# Altium PCB basketball_robot_main_board_2018.PcbDoc
Units mm, origin at the board's own origin, x right, y up, seen from the top; angles counter-clockwise.
Board outline 50 x 25 mm, 2 copper layers (Top Layer, Bottom Layer), stack 1.571 mm thick; 70 components, 69 nets, 392 pads, 85 vias.
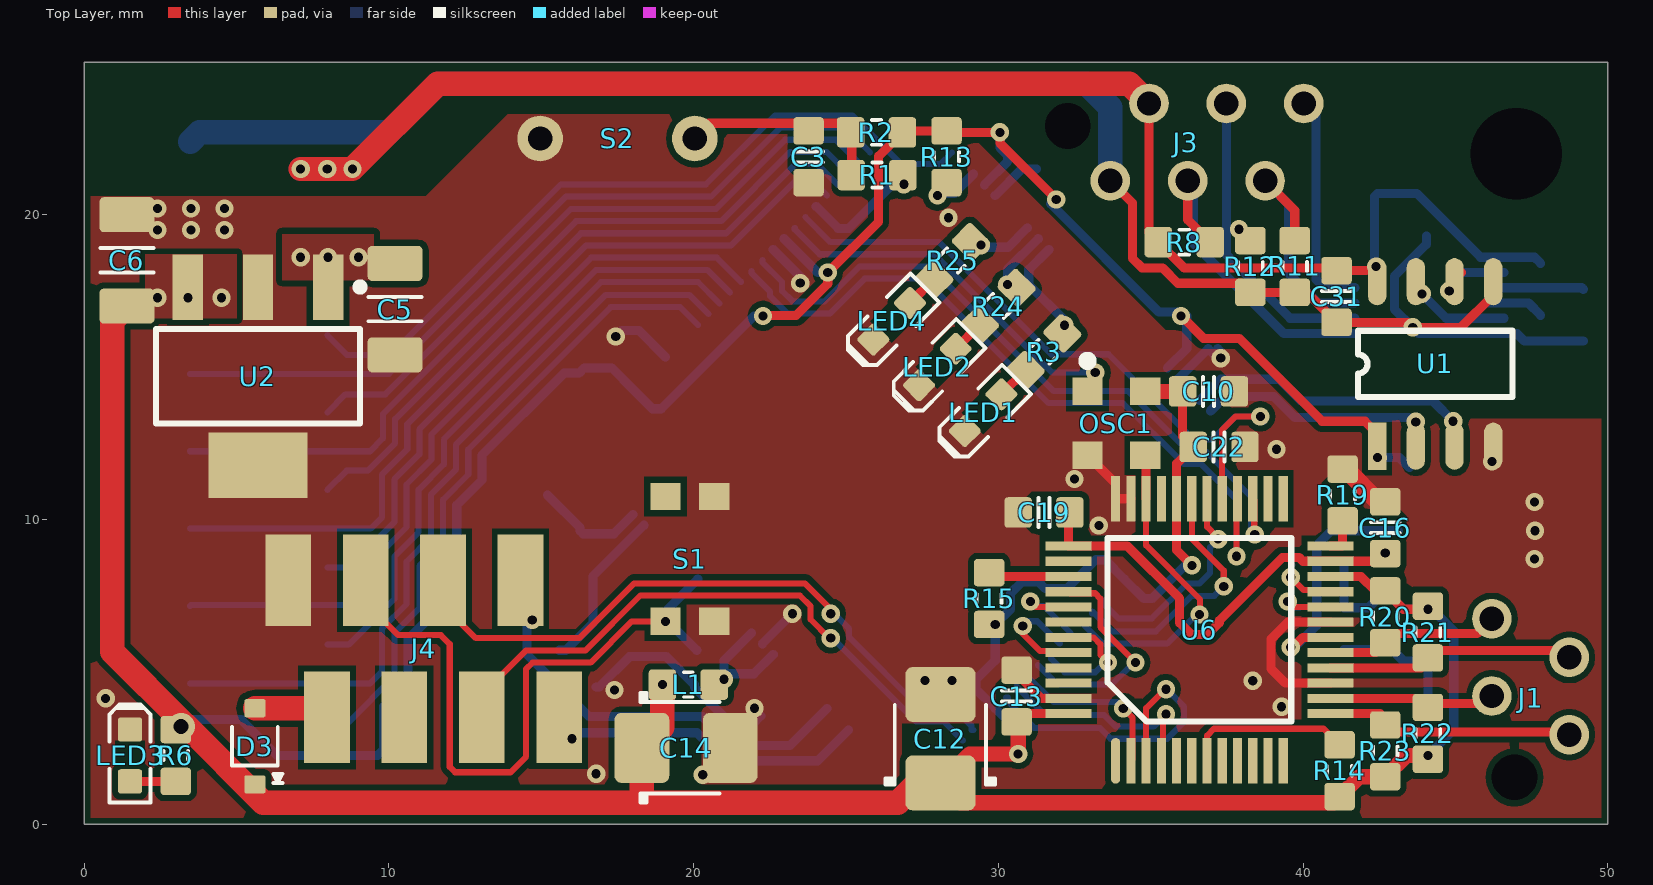
[diagram p0: Top Layer view]
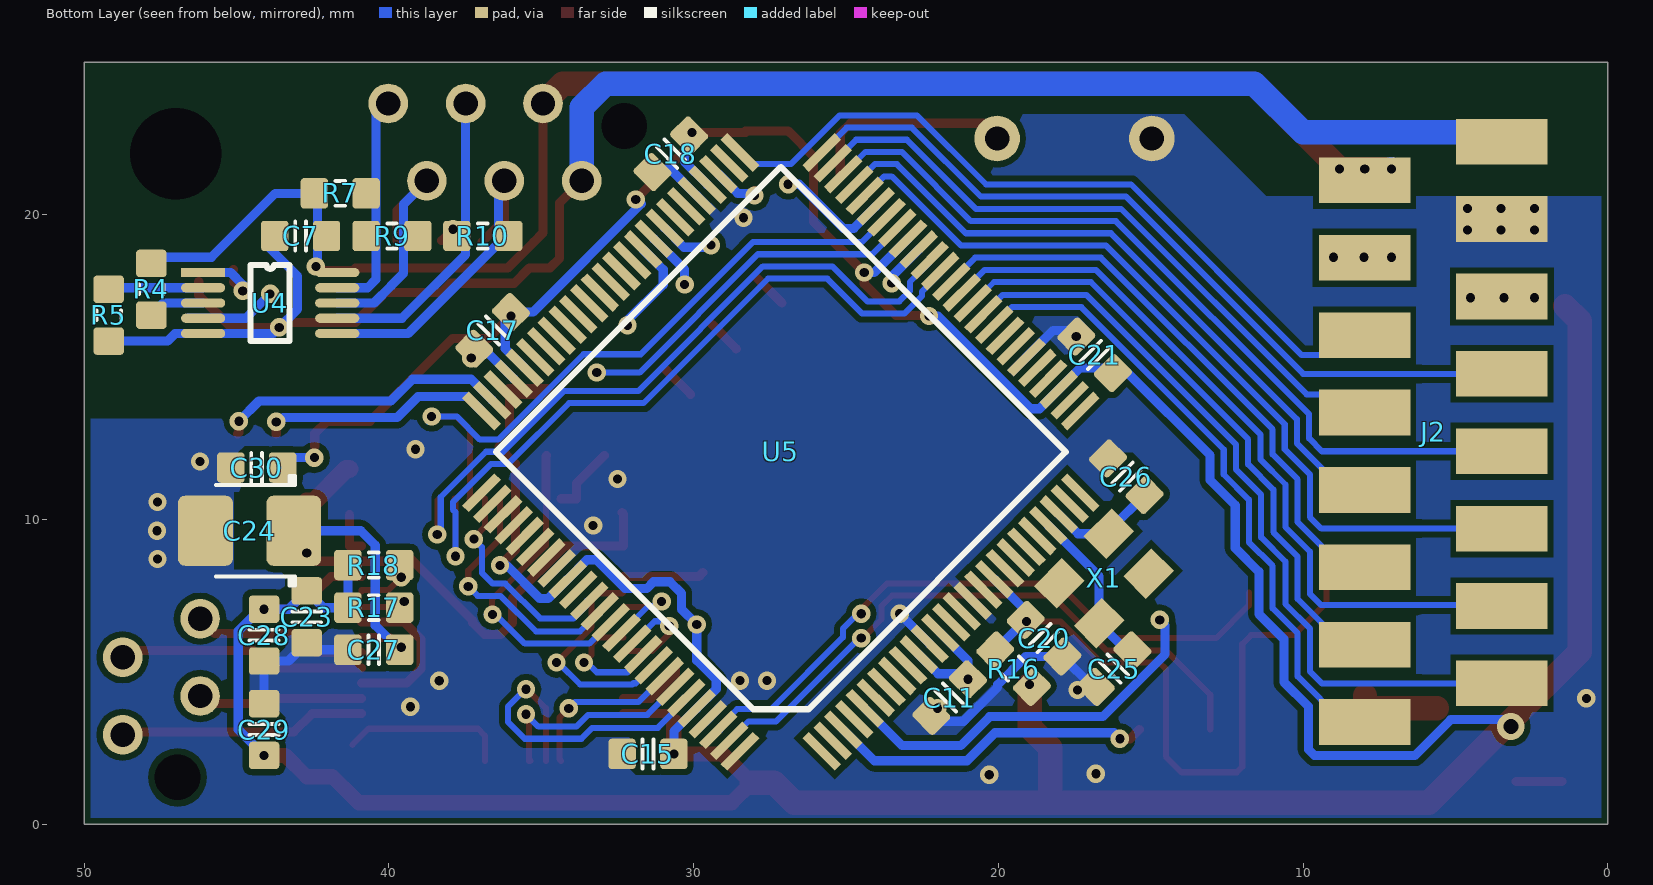
[diagram p1: Bottom Layer view, seen from below]

## Layer stack, top to bottom
Top Solder: solder mask 0.0102, Solder Resist, Dk 3.5
Top Layer: signal copper 0.0356
Dielectric 1: dielectric 1.5, FR-4, Dk 4.8
Bottom Layer: signal copper 0.0356
Bottom Solder: solder mask 0.0102, Solder Resist, Dk 3.5

## Board outline
0,0 50,0 50,25 0,25

## Design rules (kind name [scope] priority, off if disabled: settings)
BoardOutlineClearance [All] p1: gap=0.2 ignorepadtopadclearanceinfootprint=FALSE except(0: Arc-SplitContinuation Track-SplitContinuation SMDPad-SplitContinuation THPad-SplitContinuation Via-SplitContinuation Fill-SplitContinuation Poly-SplitContinuation Region-SplitContinuation Text-SplitContinuation)
Clearance [All] p1: gap=0.2 ignorepadtopadclearanceinfootprint=FALSE except(0: Arc-Hole Track-Hole SMDPad-Hole THPad-Hole Via-Hole Fill-Hole Poly-Hole Region-Hole Text-Hole)
ComponentClearance [All] p1: gap=0.2 collisioncheckmode=3 verticalgap=0.2 showdistances=FALSE
DiffPairsRouting [All] p1: maxlimit=1 minlimit=0.2 mostfreqgap=0.2 toplayer_minwidth=0.2 toplayer_maxwidth=1 toplayer_prefwidth=0.3 bottomlayer_minwidth=0.2 bottomlayer_maxwidth=1 bottomlayer_prefwidth=0.3 maxuncoupledlength=12.7
HoleSize [All] p1: absolutevalues=TRUE maxlimit=5 minlimit=0.025 maxpercent=80.000 minpercent=20.000
PolygonConnect [All] p1: connectstyle=Direct reliefconductorwidth=0.254 reliefentries=4 polygonreliefangle="90 Angle" airgapwidth=0.254
RoomDefinition basketball_robot_main_board_2018 [InComponentClass('basketball_robot_main_board_2018')] p1: confinementstyle=ConfineIn formatcopy=TRUE lockcomponents=FALSE outline -6,-5 54,-5 54,32 -6,32
RoutingVias [All] p1: holewidth=0.4 width=0.7 viastyle="Through Hole" minholewidth=0.3 minwidth=0.6 maxholewidth=3 maxwidth=4
SolderMaskExpansion SolderMaskExpansionTentedVia [IsVia] p1: expansion=-5
SolderMaskExpansion SolderMaskExpansion_1 [All] p2: expansion=0.102
Width [All] p1: maxlimit=2 minlimit=0.2 preferedwidth=0.3
27 further rules are at their usual default settings.

## Classes and differential pairs
differential pair TD: +TD_P -TD_N
differential pair RD: +RD_P -RD_N

## Components (designator, comment, footprint, x,y, rotation, side; value= is the part's Value field where it differs from the comment)
C3 "100n" CAPC1608X90N 23.77,21.9 r270 top
C5 "10u" CAPC3216X180N 10.2,16.9 r270 top value=10µ
C6 "10u" CAPC3216X180N 1.4,18.5 r90 top value=10µ
C7 "100n" CAPC1608X90N 42.9,19.3 r0 bottom
C10 "100n" CAPC1608X90N 36.9,14.2 r180 top value=18p
C11 "1u" CAPC1608X90N 21.6,4.15 r315 bottom value=1µ
C12 "10u Ta" CAPMP3528X210N 28.1,2.8 r90 top value=47µ
C13 "100n" CAPC1608X90N 30.6,4.2 r270 top value=18p
C14 "10u Ta" CAPMP3528X210N 19.75,2.5 r0 top value=47µ
C15 "100n" CAPC1608X90N 31.5,2.3 r0 bottom value=18p
C16 "100n" CAPC1608X90N 42.7,9.725 r90 top value=18p
C17 "100n" CAPC1608X90N 36.6,16.201 r315 bottom value=18p
C18 "100n" CAPC1608X90N 30.75,22 r315 bottom value=18p
C19 "100n" CAPC1608X90N 31.5,10.225 r0 top value=18p
C20 "100n" CAPC1608X90N 18.5,6.1 r225 bottom value=18p
C21 "100n" CAPC1608X90N 16.84,15.4 r45 bottom value=18p
C22 "100n" CAPC1608X90N 37.245,12.375 r180 top value=18p
C23 "100n" CAPC1608X90N 42.7,6.8 r90 bottom value=18p
C24 "10u Ta" CAPMP3528X210N 44.575,9.625 r0 bottom value=47µ
C25 "8p" CAPC1608X90N 16.2,5.1 r315 bottom value=18p
C26 "8p" CAPC1608X90N 15.8,11.4 r45 bottom value=18p
C27 "100n" CAPC1608X90N 40.5,5.718 r180 bottom value=18p
C28 "100n" CAPC1608X90N 44.1,6.2 r90 bottom value=18p
C29 "100n" CAPC1608X90N 44.1,3.1 r90 bottom value=18p
C30 "100n" CAPC1608X90N 44.341,11.7 r0 bottom
C31 "100n" CAPC1608X90N 41.1,17.315 r90 top
D3 "" SOD323 5.6,2.55 r90 top
J1 "ETHERNET" MICRO-MATCH-FOB-04 48.74,2.93 r270 top
J2 "HEADER-16" MICRO-MATCH-FOB-SMD-16 5.725,22.395 r90 bottom
J3 "RS485" MICRO-MATCH-FOB-06 33.675,21.11 r180 top
J4 "HEADER-8" MICRO-MATCH-FOB-SMD-08 6.695,5.75 r180 top
L1 "10uH" INDC1608N 19.823,4.574 r0 top value="120R @ 100 MHz"
LED1 "White" LED-0603-WHITE 29.5,13.5 r225 top
LED2 "White" LED-0603-WHITE 28,15 r225 top
LED3 "White" LED-0603-WHITE 1.5,2.25 r90 top
LED4 "White" LED-0603-WHITE 26.5,16.5 r225 top
OSC1 "DSC1033" DSC1033-3.2x2.5 32.927,14.2 r270 top
R1 "1k" RESC1608X55N 26.019,21.3 r0 top value=120R
R2 "10k" RESC1608X55N 26,22.7 r0 top value=120R
R3 "1k" RESC1608X55N 31.5,15.5 r45 top value=120R
R4 "10k" RESC1608X55N 47.8,17.55 r90 bottom value=120R
R5 "10k" RESC1608X55N 49.2,16.7 r90 bottom value=120R
R6 "1k" RESC1608X55N 3,2.25 r90 top value=120R
R7 "750R" RESC1608X55N 41.6,20.7 r180 bottom value=120R
R8 "750R" RESC1608X55N 36.1,19.1 r0 top value=120R
R9 "120R" RESC1608X55N 39.9,19.3 r180 bottom
R10 "120R" RESC1608X55N 36.921,19.3 r0 bottom
R11 "750R" RESC1608X55N 39.729,18.3 r270 top value=120R
R12 "750R" RESC1608X55N 38.271,18.3 r270 top value=120R
R13 "10k" RESC1608X55N 28.3,21.9 r90 top value=10K
R14 "10k" RESC1608X55N 41.2,1.75 r270 top value=10K
R15 "2.2k" RESC1608X55N 29.7,7.4 r90 top value=10K
R16 "10k" RESC1608X55N 19.5,5.1 r45 bottom value=10K
R17 "2.2k" RESC1608X55N 40.5,7.1 r0 bottom value=10K
R18 "2.2k" RESC1608X55N 40.5,8.5 r0 bottom value=10K
R19 "4.87k" RESC1608X55N 41.3,10.8 r90 top value=10K
R20 "49.9R" RESC1608X55N 42.7,6.8 r90 top value=10K
R21 "49.9R" RESC1608X55N 44.1,6.3 r270 top value=10K
R22 "49.9R" RESC1608X55N 44.1,2.975 r270 top value=10K
R23 "49.9R" RESC1608X55N 42.7,2.4 r90 top value=10K
R24 "1k" RESC1608X55N 30,17 r45 top value=120R
R25 "1k" RESC1608X55N 28.5,18.5 r45 top value=120R
S1 "PUSHBUTTON" KMR421NGLFS 19.875,8.7 r270 top
S2 "PUSHBUTTON" NKK_AB11AP-FA 17.5,22.5 r180 top
U1 "SI8621" SOIC8 42.435,12.4 r90 top
U2 "MCP1825S" SOT230P700X180-4N 5.7,14.7 r270 top
U4 "SN65HVD73" SOP10 46.1,18.1 r180 bottom
U5 "LPC1768" LQFP100 25.793,2.382 r45 bottom locked
U6 "DP83848C" PQFP48 33.85,2.075 r90 top locked
X1 "12MHz" XTAL-3.2x2.5 16.374,9.526 r315 bottom

## Footprints (in the part's own frame and the unit in brackets; to place one, negate y for a bottom-side part, rotate by r counter-clockwise, add the part's x,y. Pads: shape width x height; smd on the part's side, far side on the other; paste and mask are expansions set on the pad)
CAPC1608X90N [mm] "Chip Capacitor, Body 1.6x0.8mm, EIA 0603, IPC Medium Density"
  round 0.254 on Mech15: 0(0,0)
  rrect25% 0.9x1 smd: 1(-0.85,0) 2(0.85,0)
  Top Layer pour cut-out: -0.6,0.5 -0.4,0.7 0.4,0.7 0.6,0.5 0.6,-0.5 0.4,-0.7 -0.4,-0.7 -0.6,-0.5
  silkscreen extent -0.18,-0.48 0.18,0.48, body extent -0.85,-0.45 0.85,0.45, height 0.89
CAPC3216X180N [mm] "Chip Capacitor, Body 3.2x1.6mm, 1.8mm H, EIA 1206, IPC Medium Density"
  round 0.508 on Mech15: 0(0,0)
  rrect25% 1.15x1.8 smd: 1(-1.5,0) 2(1.5,0)
  silkscreen extent -0.4,-0.88 0.4,0.88, body extent -1.7,-0.9 1.7,0.9, height 1.8
CAPMP3528X210N [mm] "Molded body capacitor, Body 3.5x2.8mm, 1210, IPC Nominal settings"
  round 0.254 on Mech15: 0(0,0)
  rrect25% 1.8x2.3 smd: 1(-1.45,0) 2(1.45,0)
  Top Layer pour cut-out: -0.508,1.27 0.508,1.27 0.508,-1.27 -0.508,-1.27
  silkscreen extent -1.5,-1.8 1.1,1.8, body extent -1.75,-1.4 1.75,1.4, height 2.1
DSC1033-3.2x2.5 [mm]
  rect 0.9x1 smd: 1(0,0) 2(2.1,0) 3(2.1,1.9) 4(0,1.9)
  silkscreen extent -1.1,-0.1 -0.9,0.1, body extent -0.55,-0.3 2.65,2.2, height 0.8
INDC1608N [mm] "Chip bead, Body 1.6x0.8mm, 0603, IPC Medium Density"
  round 0.254 on Mech15: 0(0,0)
  rrect25% 0.9x1 smd: 1(-0.85,0) 2(0.85,0)
  Top Layer pour cut-out: -0.4,0.6 0.4,0.6 0.4,-0.6 -0.4,-0.6
  silkscreen extent -0.15,-0.41 0.15,0.41, body extent -0.8,-0.4 0.8,0.4, height 0.79
KMR421NGLFS [mm]
  rect 0.9x1 smd: 1(-2.05,0.8) 1(2.05,0.8) 2(-2.05,-0.8) 2(2.05,-0.8)
  body extent -2.1,-1.4 2.1,1.4, height 2.5
LED-0603-WHITE [mm]
  round 0.254 on Mech15: 0(0,0)
  rrect25% 0.8x0.8 smd: A(-0.85,0) K(0.85,0)
  Top Layer pour cut-out: -0.5,0.5 0.5,0.5 0.5,-0.5 -0.5,-0.5
  silkscreen extent -1.55,-0.68 1.68,0.68, body extent -0.8,-0.4 0.8,0.4, height 0.75
LQFP100 [mm]
  rect 1.5x0.3 smd: 1(0,0) 2(0,-0.5) 3(0,-1) 4(0,-1.5) 5(0,-2) 6(0,-2.5) 7(0,-3) 8(0,-3.5) 9(0,-4) 10(0,-4.5) 11(0,-5) 12(0,-5.5) 13(0,-6) 14(0,-6.5) 15(0,-7) 16(0,-7.5) 17(0,-8) 18(0,-8.5) 19(0,-9) 20(0,-9.5) 21(0,-10) 22(0,-10.5) 23(0,-11) 24(0,-11.5) 25(0,-12) 51(15.8,-12) 52(15.8,-11.5) 53(15.8,-11) 54(15.8,-10.5) 55(15.8,-10) 56(15.8,-9.5) 57(15.8,-9) 58(15.8,-8.5) 59(15.8,-8) 60(15.8,-7.5) 61(15.8,-7) 62(15.8,-6.5) 63(15.8,-6) 64(15.8,-5.5) 65(15.8,-5) 66(15.8,-4.5) 67(15.8,-4) 68(15.8,-3.5) 69(15.8,-3) 70(15.8,-2.5) 71(15.8,-2) 72(15.8,-1.5) 73(15.8,-1) 74(15.8,-0.5) 75(15.8,0)
  rect 0.3x1.5 smd: 26(1.9,-13.9) 27(2.4,-13.9) 28(2.9,-13.9) 29(3.4,-13.9) 30(3.9,-13.9) 31(4.4,-13.9) 32(4.9,-13.9) 33(5.4,-13.9) 34(5.9,-13.9) 35(6.4,-13.9) 36(6.9,-13.9) 37(7.4,-13.9) 38(7.9,-13.9) 39(8.4,-13.9) 40(8.9,-13.9) 41(9.4,-13.9) 42(9.9,-13.9) 43(10.4,-13.9) 44(10.9,-13.9) 45(11.4,-13.9) 46(11.9,-13.9) 47(12.4,-13.9) 48(12.9,-13.9) 49(13.4,-13.9) 50(13.9,-13.9) 76(13.9,1.9) 77(13.4,1.9) 78(12.9,1.9) 79(12.4,1.9) 80(11.9,1.9) 81(11.4,1.9) 82(10.9,1.9) 83(10.4,1.9) 84(9.9,1.9) 85(9.4,1.9) 86(8.9,1.9) 87(8.4,1.9) 88(7.9,1.9) 89(7.4,1.9) 90(6.9,1.9) 91(6.4,1.9) 92(5.9,1.9) 93(5.4,1.9) 94(4.9,1.9) 95(4.4,1.9) 96(3.9,1.9) 97(3.4,1.9) 98(2.9,1.9) 99(2.4,1.9) 100(1.9,1.9)
  silkscreen extent 1.28,-12.61 14.51,0.62, body extent -0.1,-14 15.9,2, height 1.6
MICRO-MATCH-FOB-04 [mm]
  round 1.3 hole 0.8: 1(0,0) 2(-1.27,-2.54) 3(-2.54,0) 4(-3.81,-2.54)
  round 0 hole 1.5 unplated: drill(1.4,-1.8)
  body extent -5.41,-3.77 1.6,1.23, height 4
MICRO-MATCH-FOB-06 [mm]
  round 1.3 hole 0.8: 1(0,0) 2(-1.27,-2.54) 3(-2.54,0) 4(-3.81,-2.54) 5(-5.08,0) 6(-6.35,-2.54)
  round 0 hole 1.5 unplated: drill(1.4,-1.8)
  body extent -7.95,-3.77 1.6,1.23, height 4
MICRO-MATCH-FOB-SMD-08 [mm]
  rect 1.5x3 smd: 1(0,-2.25) 2(-1.27,2.25) 3(-2.54,-2.25) 4(-3.81,2.25) 5(-5.08,-2.25) 6(-6.35,2.25) 7(-7.62,-2.25) 8(-8.89,2.25)
  body extent -10.49,-3.45 1.6,3.45, height 5.25
MICRO-MATCH-FOB-SMD-16 [mm]
  rect 1.5x3 smd: 1(0,-2.25) 2(-1.27,2.25) 3(-2.54,-2.25) 4(-3.81,2.25) 5(-5.08,-2.25) 6(-6.35,2.25) 7(-7.62,-2.25) 8(-8.89,2.25) 9(-10.16,-2.25) 10(-11.43,2.25) 11(-12.7,-2.25) 12(-13.97,2.25) 13(-15.24,-2.25) 14(-16.51,2.25) 15(-17.78,-2.25) 16(-19.05,2.25)
  body extent -20.65,-3.45 1.6,3.45, height 5.25
NKK_AB11AP-FA [mm]
  round 1.5 hole 0.8: 1(-2.54,0) 2(2.54,0)
  body extent -4.9,-2.01 4.9,3.84, height 19.42
PQFP48 [mm]
  oval 1.5x0.3 smd: 1(0,0)
  rect 1.5x0.3 smd: 2(0,-0.5) 3(0,-1) 4(0,-1.5) 5(0,-2) 6(0,-2.5) 7(0,-3) 8(0,-3.5) 9(0,-4) 10(0,-4.5) 11(0,-5) 12(0,-5.5) 25(8.6,-5.5) 26(8.6,-5) 27(8.6,-4.5) 28(8.6,-4) 29(8.6,-3.5) 30(8.6,-3) 31(8.6,-2.5) 32(8.6,-2) 33(8.6,-1.5) 34(8.6,-1) 35(8.6,-0.5) 36(8.6,0)
  rect 0.3x1.5 smd: 13(1.55,-7.05) 14(2.05,-7.05) 15(2.55,-7.05) 16(3.05,-7.05) 17(3.55,-7.05) 18(4.05,-7.05) 19(4.55,-7.05) 20(5.05,-7.05) 21(5.55,-7.05) 22(6.05,-7.05) 23(6.55,-7.05) 24(7.05,-7.05) 37(7.05,1.55) 38(6.55,1.55) 39(6.05,1.55) 40(5.55,1.55) 41(5.05,1.55) 42(4.55,1.55) 43(4.05,1.55) 44(3.55,1.55) 45(3.05,1.55) 46(2.55,1.55) 47(2.05,1.55) 48(1.55,1.55)
  silkscreen extent 1.28,-5.76 7.31,0.27, body extent -0.27,-7.33 8.87,1.82, height 1.62
RESC1608X55N [mm] "Chip Resistor, Body 1.6x0.8mm, EIA 0603, IPC Medium Density"
  round 0.254 on Mech15: 0(0,0)
  rrect25% 0.9x1 smd: 1(-0.85,0) 2(0.85,0)
  Top Layer pour cut-out: -0.6,0.5 -0.4,0.7 0.4,0.7 0.6,0.5 0.6,-0.5 0.4,-0.7 -0.4,-0.7 -0.6,-0.5
  silkscreen extent -0.15,-0.41 0.15,0.41, body extent -0.87,-0.47 0.88,0.48, height 0.54
SOD323 [mm] "SOD-323; 2 Leads; Body 1.8 x 1.35 mm, (LxW)"
  round 0.508 on Mech15: 0(0,0)
  rrect25% 0.6x0.7 smd: A(1.25,0) K(-1.25,0)
  silkscreen extent -1.2,-0.9 0.64,0.75, body extent -1.3,-0.68 1.3,0.68, height 1.1
SOIC8 [mm]
  rect 1.55x0.6 smd: 1(0,0)
  oval 1.55x0.6 smd: 2(0,-1.27) 3(0,-2.54) 4(0,-3.81) 5(5.4,-3.81) 6(5.4,-2.54) 7(5.4,-1.27) 8(5.4,0)
  silkscreen extent 1.61,-4.44 3.79,0.64, body extent -0.16,-4.35 5.61,0.55, height 1.46
SOP10 [mm]
  rect 1.45x0.3 smd: 1(0,0)
  oval 1.45x0.3 smd: 2(0,-0.5) 3(0,-1) 4(0,-1.5) 5(0,-2) 6(4.4,-2) 7(4.4,-1.5) 8(4.4,-1) 9(4.4,-0.5) 10(4.4,0)
  silkscreen extent 1.56,-2.25 2.84,0.25, body extent -0.27,-2.5 4.63,0.5, height 1.15
SOT230P700X180-4N [mm] "SOT223, 4-Leads, Body 6,50x7,00mm (avg), Pitch 2,30mm, IPC Medium Density"
  rect 2.15x1 smd: 1(-2.925,2.3) 2(-2.925,0) 3(-2.925,-2.3)
  rect 2.15x3.25 smd: 4(2.925,0)
  silkscreen extent -3.05,-3.35 1.55,3.48, body extent -1.85,-3.35 1.85,3.35, height 1.8
XTAL-3.2x2.5 [mm]
  rect 1.3x1.05 smd: 1(0,0) 2(2.3,0) 3(2.3,1.85) 4(0,1.85)
  body extent -0.45,-0.32 2.75,2.18, height 0.8

## Part data
C3 C7 C30 C31: library part CAPC_100n_0603_X7R_50V_10%, "Capacitor SMD Cer 100nF 10% 50V X7R 0603", Manufacturer 1="AVX Corporation", Manufacturer 2="TDK Corporation", Manufacturer Part Number 1=06035C104KAT2A, Manufacturer Part Number 2=C1608X7R1H104K, Package / Case="0603 (1608 Metric)", Ratings="50V; X7R", Supplier Part Number 1=478-5052-1-ND, Tolerance=±10%, ComponentLink1Description=http://www.avx.com/docs/Catalogs/cx7r.pdf, ComponentLink1URL=http://www.avx.com/docs/Catalogs/cx7r.pdf, ComponentLink2Description=http://product.tdk.com/capacitor/mlcc/en/documents/mlcc_commercial_general_en.pdf, ComponentLink2URL=http://product.tdk.com/capacitor/mlcc/en/documents/mlcc_commercial_general_en.pdf, Material=ceramic, SCDType=spec, Supplier 1=Digi-Key, Supplier 2=Digi-Key, Supplier Part Number 2=445-1314-1-ND
C5 C6: library part CAPC_10u_1206_10V, "Capacitor SMD Cer 10uF 10% 10V X5R 1206", Manufacturer 1=KEMET, Manufacturer Part Number 1=C1206C106K8PACTU, Package / Case="1206 (3216 metric)", Ratings="10V; X5R", Supplier Part Number 1=C1206C106K8PACTU-ND, Tolerance=±10%, Material=ceramic, SCDType=undef, Supplier 1=Digi-Key
C10 C13 C15 C16 C17 C18 C19 C20 C21 C22 C23 C25 C26 C27 C28 C29: library part CAPC_18p_0603_100V, "Capacitor SMD Cer 18pF 2% 100V NP0 0603", Manufacturer 1="AVX Corporation", Manufacturer Part Number 1=06031A180GAT2A, Operating Temperature="-55°C ~ 125°C", Package / Case="0603 (1608 Metric)", Ratings="100V; NP0", Supplier Part Number 1=478-6025-1-ND, Tolerance=±2%, ComponentLink1Description=http://www.avx.com/docs/Catalogs/ccog.pdf, ComponentLink1URL=http://www.avx.com/docs/Catalogs/ccog.pdf, SCDType=spec, Size / Dimension="0.063\" L x 0.032\" W (1.60mm x 0.81mm)", Supplier 1=Digi-Key, Thickness (Max)="0.035\" (0.90mm)"
C11: library part CAPC_1u_0603_X7R_16V_10%, "Capacitor SMD Cer 1uF 10% 16V X7R 0603", Manufacturer 1="TDK Corporation", Manufacturer Part Number 1=C1608X7R1C105K, Package / Case="0603 (1608 metric)", Ratings="16V; X7R", Supplier Part Number 1=445-1604-1-ND, Tolerance=±10%, ComponentLink1Description=http://product.tdk.com/capacitor/mlcc/en/documents/mlcc_commercial_general_en.pdf, ComponentLink1URL=http://product.tdk.com/capacitor/mlcc/en/documents/mlcc_commercial_general_en.pdf, Material=ceramic, SCDType=spec, Supplier 1=Digi-Key
C12 C14 C24: library part CAPT_47u_1210_6V3, "Capacitor SMD Tantalum 47uF 20% 6.3V 1210", ESR (Equivalent Series Resistance)="70.0 mOhm", Manufacturer 1="AVX Corporation", Manufacturer Part Number 1=TCJB476M006R0070, Manufacturer Size Code=B, Operating Temperature="-55°C ~ 125°C", Package / Case="1210 (3528 Metric)", Ratings=6.3V, Supplier Part Number 1=478-3139-1-ND, Tolerance=±20%, Voltage - Rated=6V3, ComponentLink1Description=http://www.avx.com/docs/Catalogs/tcj.pdf, ComponentLink1URL=http://www.avx.com/docs/Catalogs/tcj.pdf, Height - Seated (Max)="0.083\" (2.10mm)", Material=Tantalum, SCDType=spec, Size / Dimension="0.138\" L x 0.110\" W (3.50mm x 2.80mm)", Supplier 1=Digi-Key, Type=Molded
D3: library part DIODE_SCHOTTKY_SS0520, "Diode Schottky SMD 20V 0.5A SOD123", Manufacturer 1="Fairchild Semiconductor", Manufacturer 2="ON Semiconductor", Manufacturer 3="Diodes Inc", Manufacturer 4="DC Components Co", Manufacturer Part Number 1=MBR0520L, Manufacturer Part Number 2=MBR0520LT1G, Manufacturer Part Number 3=B0520LW-7-F, Manufacturer Part Number 4=SS0520, Package / Case=SOD-123, Ratings="20V; 0.5A", Supplier Part Number 1=MBR0520LCT-ND, ComponentLink1Description=http://www.fairchildsemi.com/ds/MB/MBR0520L.pdf, ComponentLink1URL=http://www.fairchildsemi.com/ds/MB/MBR0520L.pdf, ComponentLink2Description=http://www.onsemi.com/pub_link/Collateral/MBR0520LT1-D.PDF, ComponentLink2URL=http://www.onsemi.com/pub_link/Collateral/MBR0520LT1-D.PDF, ComponentLink3Description=http://www.diodes.com/datasheets/ds30051.pdf, ComponentLink3URL=http://www.diodes.com/datasheets/ds30051.pdf, Material=Si, SCDType=source, Supplier 1=Digi-Key, Supplier 2=Digi-Key, Supplier 3=Digi-Key, Supplier Part Number 2=MBR0520LT1GOSCT-ND, Supplier Part Number 3=B0520LW-FDICT-ND
J1: library part HEADER-4
J3: library part HEADER-6
L1: library part FERRITE_120R-100MHz_0603, "Ferrite bead 120 Ohm at 100 MHz 2A 0603 SMD", Current=900mA, Current Rating=2A, DC Resistance (DCR)="172.9 mOhm Max", Frequency - Self Resonant=23MHz, Frequency - Test=100kHz, Impedance @ Frequency="120 Ohm @ 100MHz", Manufacturer 1="Murata Electronics North America", Manufacturer Part Number 1=BLM18PG121SN1D, Operating Temperature="-40°C ~ 105°C", Package / Case="1210 (3225 Metric)", Ratings="2 A; 50 mO DC", Supplier Part Number 1=490-1037-1-ND, Applications="Power Supplies", ComponentLink1Description=http://www.yuden.co.jp/ut/product/pdf/wound02_e.pdf, ComponentLink1URL=http://www.yuden.co.jp/ut/product/pdf/wound02_e.pdf, ComponentLink2Description=http://search.murata.co.jp/Ceramy/image/img/PDF/ENG/L0110S0100BLM18P.pdf, ComponentLink2URL=http://search.murata.co.jp/Ceramy/image/img/PDF/ENG/L0110S0100BLM18P.pdf, Current - Saturation=900mA, Current - Temperature Rise=900mA, Filter Type="Differential Mode - Single", Height (Max)="0.037\" (0.95mm)", Mounting Type="Surface Mount", Number of Lines=1, SCDType=source, Size / Dimension="0.063\" L x 0.031\" W (1.60mm x 0.80mm)", Supplier 1=Digi-Key
LED1 LED2 LED3 LED4: library part LED_SMD_White_0603_Bright, "LED 0603 SMD Bright White 8700K", Luminous Flux @ Current - Test=-, Manufacturer 1="Lite-On Inc", Manufacturer 2="Kingbright Corp", Manufacturer Part Number 1=LTW-C193TS5, Manufacturer Part Number 2=APT1608QWF/D, Millicandela Rating=230mcd, Package / Case="0603 (1608 metric)", Ratings="Ultra Bright; 8700K", Supplier Part Number 1=160-1721-1-ND, Voltage - Forward (Vf) @ 10mA=3.0V, Voltage - Forward (Vf) Typ=3.3V, Color=White, ComponentLink1Description=http://media.digikey.com/pdf/Data%20Sheets/Lite-On%20PDFs/LTW-C193TS5.pdf, ComponentLink1URL=http://media.digikey.com/pdf/Data%20Sheets/Lite-On%20PDFs/LTW-C193TS5.pdf, ComponentLink2Description=http://www.kingbrightusa.com/images/catalog/SPEC/APT1608QWF-D.pdf, ComponentLink2URL=http://www.kingbrightusa.com/images/catalog/SPEC/APT1608QWF-D.pdf, Lens Style/Size="Rectangle with Flat Top, 0.8mm x 1.1mm", Lens Type="Clear, Tinted", Material=InGaN, Mounting Type="Surface Mount", SCDType=source, Size / Dimension="1.60mm L x 0.80mm W", Supplier 1=Digi-Key, Supplier 2=Digi-Key, Supplier Part Number 2=APT1608QWF/D-ND, Viewing Angle=120°
R1 R2 R3 R4 R5 R6 R7 R8 R9 R10 R11 R12 R24 R25: library part RES_120R_0603_5%, "Resistor SMD chip 120 Ohm 0.1W 5% 0603", Manufacturer 1="Vishay Dale", Manufacturer 2=Yageo, Manufacturer Part Number 1=CRCW0603120RJNEA, Manufacturer Part Number 2=RC0603JR-07120RL, Package / Case="0603 (1608 metric)", Ratings="1/10 W", Supplier Part Number 1=541-120GCT-ND, Tolerance=±5%, ComponentLink1Description=http://www.vishay.com/doc?20035, ComponentLink1URL=http://www.vishay.com/doc?20035, ComponentLink2Description=http://www.yageo.com/documents/recent/PYu-RC0603_51_RoHS_L_4.pdf, ComponentLink2URL=http://www.yageo.com/documents/recent/PYu-RC0603_51_RoHS_L_4.pdf, Material="Thick Film", SCDType=spec, Supplier 1=Digi-Key, Supplier 2=Digi-Key, Supplier Part Number 2=311-120GRCT-ND
R13 R14 R15 R16 R17 R18 R19 R20 R21 R22 R23: library part RES_10K_0603_5%, "Resistor SMD chip 10k Ohm 0.1W 5% 0603", Manufacturer 1=Yageo, Manufacturer 2="Vishay Dale", Manufacturer Part Number 1=RC0603JR-0710KL, Manufacturer Part Number 2=CRCW060310K0JNEA, Package / Case="0603 (1608 metric)", Ratings="1/10 W", Supplier Part Number 1=311-10KGRCT-ND, Tolerance=±5%, ComponentLink1Description=http://www.yageo.com/documents/recent/PYu-RC0603_51_RoHS_L_4.pdf, ComponentLink1URL=http://www.yageo.com/documents/recent/PYu-RC0603_51_RoHS_L_4.pdf, ComponentLink2Description=http://www.vishay.com/doc?20035, ComponentLink2URL=http://www.vishay.com/doc?20035, Material="Thick Film", SCDType=spec, Supplier 1=Digi-Key, Supplier 2=Digi-Key, Supplier Part Number 2=541-10KGCT-ND
U2: library part MIC5239
U4: library part SN65HVD3086E
X1: library part XTAL-3.2X2.5

## Free pads (board coordinates)
  round 0 hole 3 unplated: 2(47,22)

## Via types
v1: diameter 0.6, hole 0.3, Top Layer to Bottom Layer, 84 vias
v2: diameter 0.9, hole 0.5, Top Layer to Bottom Layer, 1 vias

## Nets (pads, with @x,y where several pads share a name; then routed paths per layer and width w, separated by ;. In a path a pad name is that pad's centre, name@x,y a point inside that pad or via, vN(x,y) a via of type N, cw(c..) or ccw(c..) an arc to the next point about the centre after c; other vN are vias at no path point)
3.3V: C6.1 C10.2 C12.1 C13.2 C14.1 C15.1 C17.1 C18.1 C21.1 C22.2 C23.2 C28.2 C29.1 C30.1 D3.K J2.5 L1.1 OSC1.4 R2.2 R6.2 R13.2 R14.2 R15.1 R16.1 R17.2 R18.2 R20.2 R21.1 R22.2 R23.1 U1.1 U2.3 U5.28 U5.42 U5.54 U5.71 U5.84 U5.96 U6.22 U6.32 U6.48 | length 170.2
  Top Layer w0.3: v1(22.276,16.676) 22.342,16.676 22.36,16.694 23.362,16.694 24.4,17.733 v1(24.4,18.1) 26.069,19.769 26.069,21.919 R2.2 26.9,22.75 R13.2 ; R13.2@28.3,22.701 v1(30.049,22.701) 30.049,22.351 v1@31.8,20.6 ; C13.2 30.875,3.625 U6.48 ; v1(35.999,16.676) 36.736,15.939 37.908,15.939 40.628,13.22 42.031,13.22 42.435,12.816 U1.1 ; C10.2 36.05,12.72 C22.2 35.85,11.83 U6.32 35.85,8.991 v1(36.353,8.488) ; U6.22 41.9,8.125 42.375,7.65 R20.2 43.3,7.05 v1(44.1,7.05)
  Top Layer w0.5: C13.2 30.65,3.3 v1(30.65,2.3) 29.05,2.3 C12.1 28.75,0.7 41,0.7 R14.2 41.85,1.55 R23.1 43.4,2.25 v1(44.1,2.25) ; OSC1.4 C10.2
  Top Layer w0.8: C6.1 0.917,16.517 0.917,5.656 R6.2@3.273,3.3 ; R6.2@3.336,3.236 5.873,0.7 18.2,0.7 ; v1(18.973,4.574) 18.973,3.173 C14.1 18.3,0.8 18.2,0.7 ; C12.1 27.35,1.35 26.7,0.7 18.2,0.7
  Bottom Layer w0.3: v2(3.175,3.2) 3.4,3.425 5.15,3.425 6.33,2.245 9.62,2.245 9.825,2.45 9.825,3.859 10.625,4.659 10.625,6.067 11.45,6.892 11.45,8.285 12.225,9.06 12.225,10.46 13.05,11.285 13.05,12.105 15.744,14.799 C21.1 16.409,14.969 17.307,14.969 U5.28 18.647,13.629 18.937,13.629 21.984,16.676 v1(22.276,16.676) ; U5.42 24.076,18.1 v1(24.4,18.1) ; U5.54 30.3,21.739 30.3,21.949 30.049,22.2 v1(30.049,22.701) ; v1(30.65,2.3) 30.65,3.04 U5.96 29.261,4.43 29.261,4.731 29.9,5.37 v1(29.9,6.55) 30.4,7.05 30.4,7.569 30.781,7.95 31.319,7.95 31.544,7.725 32.25,7.725 33.2,8.675 33.501,8.675 U5.84 34.776,7.4 35.053,7.4 36.141,8.488 v1(36.353,8.488) ; v1@31.718,20.357 35.273,16.802 C17.1 v1(35.999,16.676) ; U5.71 36.183,15.602 C17.1@36.183,16.676 ; R18.2 R17.2 42.15,7.1 C23.2 43.3,7.05 v1(44.1,7.05) ; v1(42.45,12.025) 43.166,12.025 C30.1 ; v1(44.1,2.25) 44.95,3.1 44.95,6.333 44.233,7.05 v1(44.1,7.05) ; C28.2@44.375,7.325 v1(44.1,7.05)
  other v1: 2.4,17.275 3.4,17.275 4.5,17.275 31.9,20.5
3.3V_RS485: C7.1 C31.2 J2.2 J3.2 R4.2 R7.1 R8.1 U1.8 U4.10 | length 50
  Top Layer w0.3: J3.2 34.945,19.405 R8.1 36.1,18.25 41.1,18.25 C31.2 42.07,18.165
  Top Layer w0.8: v1(7.1,21.5) v1(7.975,21.5) v1(8.8,21.5) 11.6,24.3 34.295,24.3 J3.2
  Bottom Layer w0.3: v1(42.4,18.3) 42.35,18.35 42.35,20.6 R7.1 43.729,20.7 45.829,18.6 47.6,18.6 R4.2
5V: C5.1 J2.4 U2.1
  other v1: 7.1,18.6 8,18.6 9,18.6
50MHz: OSC1.3 U5.88 U6.34 | length 10.7
  Top Layer w0.2: U6.34 34.85,9.143 36.619,7.374 v1@36.619,6.893
  Top Layer w0.3: OSC1.3 34.85,12.076 U6.34
  Bottom Layer w0.2: U5.88 33.429,5.918 35.538,5.918 36.495,6.875 v1(36.602,6.875) v1@36.802,6.875
A: J3.6 R7.2 R9.1 U4.9 | length 7.3
  Bottom Layer w0.3: J3.6@40.425,23.75 40.425,17.875 40.7,17.6 U4.9
B: J3.5 R9.2 R11.1 U4.8 | length 8.3
  Top Layer w0.3: J3.5 39.729,20.136 R11.1
  Bottom Layer w0.3: J3.5 39.525,20.34 39.525,18.075 39.925,17.675 39.925,17.668 40.493,17.1 U4.8
BALL1: J2.6 U5.51 | length 24.8
  Bottom Layer w0.2: J2.6 8.62,15.4 10.052,15.4 15.642,20.99 20.403,20.99 22.672,23.259 25.21,23.259 26.81,21.659 28.098,21.659 U5.51
BALL2: J2.7 U5.50 | length 26
  Bottom Layer w0.2: J2.7 9.992,14.775 15.808,20.59 20.569,20.59 22.837,22.859 24.974,22.859 U5.50
BTN: R1.2 U5.45 | length 3.8
  Bottom Layer w0.3: U5.45 24.747,19.55 25.088,19.55 26.538,21 v1(26.9,21)
DE: R4.1 U4.3 | length 1.9
  Bottom Layer w0.3: U4.3 47.4,17.1 R4.1
ETH_OSC_EN: OSC1.1 U5.43 | length 11.9
  Bottom Layer w0.2: U5.43 23.318,19.518 24.136,18.7 27.891,18.7 31.772,14.818 v1(33.182,14.818)
ETH_RST: U5.44 U6.29 | length 22.1
  Top Layer w0.2: U6.29 37.345,10.68 37.345,12.933 37.788,13.377 v1(38.6,13.377)
  Bottom Layer w0.2: U5.44 24.49,19.1 28.057,19.1 31.738,15.418 33.616,15.418 36.416,12.618 37.018,12.618 37.777,13.377 38.523,13.377 v1@38.7,13.2
GND: C3.2 C5.2 C6.2 C10.1 C11.2 C12.2 C13.1 C14.2 C15.2 C16.2 C17.2 C18.2 C19.1 C20.2 C21.2 C22.1 C23.1 C24.2 C25.2 C26.2 C27.1 C28.1 C29.2 C30.2 J2.3 J4.1 LED1.K LED2.K LED3.K LED4.K OSC1.2 R19.2 S1.1 S2.2 U1.4 U2.2 U2.4 U5.11 U5.15 U5.31 U5.41 U5.55 U5.72 U5.83 U5.97 U6.15 U6.19 U6.35 U6.36 U6.47 | length 32.1
  Top Layer w0.3: C13.1 30.6,4.93 31.405,4.125 U6.47 ; OSC1.2 33.85,11.176 U6.36 U6.35 ; U6.15 39.425,4.625 38.95,5.1 38.95,6.069 39.506,6.625 U6.19
  Top Layer w0.6: R19.2 41.403,11.65 42.478,10.575 C16.2
  Bottom Layer w0.3: C25.2 16.899,4.499 C20.2 19.1,5.499 20.024,4.575 20.024,4.493 21.145,3.372 22.024,3.372 C11.2 ; v1(17.441,16.001) 17.641,16.201 18.196,16.201 U5.31 ; U5.11 v1(23.239,6.9) ; U5.41 23.5,17.969 v1(23.5,17.752) ; U5.55 30.767,21.499 C18.2@31.251,21.499 ; U5.72 36.889,15.6 37.089,15.4 37.3,15.4 C17.2@37.401,15.4 ; C17.2 C17.2@37.401,15.4 ; v1(37.3,15.289) 37.3,15.299 C17.2@37.401,15.4 ; C27.1 42.468,5.718 C23.1 43.3,5.35 C28.1 C29.2 ; v1@46.1,12 v1(46.2,11.9)
  other v1: 20.3,1.618 16.8,1.65 22,3.8 39.3,3.849 0.7,4.125 17.4,4.4 27.595,4.706 28.48,4.706 38.35,4.7 47.6,8.7 47.618,9.625 33.3,9.8 47.6,10.568 32.5,11.321 39.129,12.3 2.4,19.5 3.5,19.5 4.6,19.5 28.363,19.9 2.4,20.2 3.5,20.2 4.6,20.2
GND_RS485: C7.2 C31.1 J2.1 J3.1 R5.1 R11.2 R12.2 U1.5 U4.5 | length 59.7
  Top Layer w0.3: J3.1 34.4,20.385 34.4,18.571 34.721,18.25 35.393,18.25 35.893,17.75 37.971,17.75 R12.2 R11.2 40.115,17.45 C31.1 43.435,16.465 v1(43.6,16.3) 45.185,16.3 46.245,17.36 U1.5
  Bottom Layer w0.3: C7.2@44.05,19.3 44.05,19.031 43,17.981 43,16.9 v1(43.6,16.3) 43.8,16.1 U4.5 47.021,16.1 47.271,15.85 R5.1
  Bottom Layer w0.8: J2.1 3.78,22.7 10.002,22.7 11.602,24.3 32.895,24.3 33.675,23.52 J3.1
ISP: R13.1 U5.53 | length 1.7
  Top Layer w0.3: v1(28,20.626) 28,20.792 R13.1@28.041,20.75
  Bottom Layer w0.3: v1(28,20.626) 28.074,20.7 28.554,20.7 U5.53
LED1: R3.2 U5.60 | length 3.2
  Bottom Layer w0.3: U5.60 31,18.196 31,17.7 32.174,16.526 v1(32.174,16.371)
LED2: R24.2 U5.59 | length 1.9
  Bottom Layer w0.3: v1(30.295,17.71) 30.3,17.715 30.3,18.204 U5.59
LED3: R25.2 U5.58 | length 1.8
  Bottom Layer w0.3: v1(29.433,19) 29.501,18.932 30.322,18.932 U5.58
LED_LINK: U5.39 U6.28 | length 23.9
  Top Layer w0.2: v1(37.815,8.788) 37.815,9.599 37.815,10.64 U6.28
  Bottom Layer w0.2: U5.39 21.903,18.08 22.5,17.484 22.5,17.338 23.086,16.752 24.466,16.752 25.614,17.9 27.559,17.9 31.641,13.818 34.085,13.818 36.085,11.818 36.651,11.818 37.901,10.568 37.901,10.319 37.815,10.233 37.815,9.599 v1(37.815,8.788)
LED_SPEED: U5.40 U6.27 | length 22.9
  Top Layer w0.2: U6.27 38.4,10.625 38.4,9.518 v1(38.415,9.503)
  Bottom Layer w0.2: U5.40 22.257,18.434 22.9,17.791 22.9,17.503 23.251,17.152 24.3,17.152 25.448,18.3 27.725,18.3 31.807,14.218 34.25,14.218 36.251,12.218 36.816,12.218 38.301,10.733 38.301,9.617 v1(38.415,9.503)
MII_MODE: R15.2 U6.39 | length 2.7
  Top Layer w0.3: R15.2 29.825,8.125 U6.39
MISO: J2.13 U5.37 | length 24.7
  Bottom Layer w0.2: J2.13 3.511,7.191 9.415,7.191 9.775,7.551 9.775,8.944 10.575,9.744 10.575,11.144 11.4,11.969 11.4,12.788 16.802,18.19 20.45,18.19 U5.37
MOSI: J2.12 U5.38 | length 19.4
  Bottom Layer w0.2: J2.12 8.691,8.425 10.175,9.909 10.175,11.309 11,12.134 11,12.954 16.636,18.59 20.757,18.59 U5.38
NC20: R17.1 U6.20 | length 2
  Top Layer w0.2: v1(39.5,7.3) 39.675,7.125 U6.20
  Bottom Layer w0.2: v1(39.5,7.3) 39.5,7.2 39.6,7.1 R17.1 R17.1@39.9,7.1
NC21: R18.1 U6.21 | length 1.9
  Top Layer w0.2: v1(39.6,8.1) 40.026,7.675 40.9,7.675 U6.21
  Bottom Layer w0.2: v1(39.6,8.1) R18.1@39.6,8.45 ; R18.1@39.6,8.45 R18.1
NetC3_1: C3.1 R1.1 R2.1 S2.1 | length 6.1
  Top Layer w0.3: S2.1@20.5,23 24.85,23 R2.1 25.188,22.662 R1.1@25.188,21.35
NetD3_A: D3.A J4.2 | length 3.2
  Top Layer w0.8: D3.A 7.665,3.8 J4.2 J4.2@7.965,4.209
NetLED1_A: LED1.A R3.1 | length 1.1
  Top Layer w0.3: LED1.A R3.1
NetLED2_A: LED2.A R24.1 | length 1.1
  Top Layer w0.3: LED2.A R24.1
NetLED3_A: LED3.A R6.1 | length 1.5
  Top Layer w0.3: LED3.A R6.1
NetLED4_A: LED4.A R25.1 | length 1.1
  Top Layer w0.3: LED4.A R25.1
NetR14_1: R14.1 U6.7 | length 5.5
  Top Layer w0.2: U6.7 36.85,2.899 37.076,3.125 40.675,3.125 R14.1
nRE: R5.2 U4.2 | length 3.1
  Bottom Layer w0.3: U4.2 49.15,17.6 R5.2
NRESET: C20.1 J4.3 R16.2 S1.2 U5.17 | length 22.2
  Top Layer w0.2: J4.3 9.235,7.265 10.3,6.2 11.7,6.2 11.995,5.905 11.995,1.876 12.171,1.7 13.99,1.7 14.5,2.21 14.5,5.089 14.711,5.3 16.618,5.3 17.968,6.65 v1(19.075,6.65) S1.2@19.2,6.65
  Bottom Layer w0.3: C20.1@19.001,6.801 19.001,6.905 U5.17 ; C20.1 R16.2
PFOUT: C16.1 C19.2 C24.1 C27.2 U6.18 U6.23 U6.37 | length 22.5
  Top Layer w0.3: C19.2 32.3,10.175 U6.37 34.232,9.125 35.952,7.405 35.952,6.606 36.333,6.225 36.871,6.225 37.252,6.606 37.252,6.671 39.331,8.75 39.869,8.75 39.994,8.625 U6.23 42.45,8.625 C16.1 ; v1(39.6,5.8) 39.675,5.8 40,6.125 U6.18
  Bottom Layer w0.3: v1(39.6,5.8) 39.729,5.8 40.45,6.521 40.45,9.15 40.925,9.625 C24.1
  other v1: 42.7,8.9
RBIAS: R19.1 U6.24 | length 1.4
  Top Layer w0.3: U6.24 41.289,9.125 41.3,9.136 R19.1 R19.1@41.3,10.15
RD_N: J1.1 R23.2 U6.13 | length 8.1
  Top Layer w0.3: U6.13 42.525,3.625 43.125,3.025 48.645,3.025 J1.1
RD_P: J1.2 R22.1 U6.14 | length 5.6
  Top Layer w0.3: U6.14 43.925,4.125 44.1,3.95 R22.1@44.2,3.95 ; R22.1@44.1,3.85 R22.1@44.2,3.95 ; J1.2 45.95,3.95 R22.1@44.2,3.95
RX: U1.3 U5.74 | length 9.6
  Top Layer w0.3: v1(44.929,13.22) 44.929,12.846 U1.3@44.975,12.8
  Bottom Layer w0.3: U5.74 37.303,14.6 39.225,14.6 39.943,13.882 44.267,13.882 v1(44.929,13.22)
RX_LIDAR: J2.10 U5.47 | length 21.9
  Bottom Layer w0.2: J2.10 8.61,11.6 9.31,11.6 10.2,12.49 10.2,13.285 16.305,19.39 21.066,19.39 23.334,21.659 24.053,21.659 U5.47
RX_RS485: U1.6 U4.1 | length 2.7
  Top Layer w0.3: v1(44.8,17.5) U1.6@45.1,17.8 ; U1.6@45.1,18.2 U1.6@45.2,18.1
  Bottom Layer w0.3: v1(44.8,17.5) 44.8,17.7 45.2,18.1 U4.1 U4.1@46.6,18.1
RX_XBEE: J2.8 U5.49 | length 21.5
  Bottom Layer w0.2: J2.8 8.57,14.1 9.883,14.1 15.973,20.19 20.734,20.19 23.003,22.459 24.667,22.459 U5.49
SCK: J2.16 U5.34 | length 21
  Bottom Layer w0.2: J2.16 8.675,3.345 10.175,4.845 10.175,6.254 11,7.079 11,8.472 11.775,9.247 11.775,10.647 12.6,11.472 12.6,12.291 17.275,16.966 19.553,16.966 U5.34
SS1: J2.15 U5.35 | length 25.5
  Bottom Layer w0.2: J2.15 9.379,4.615 9.775,5.011 9.775,6.419 10.575,7.219 10.575,8.612 11.375,9.412 11.375,10.812 12.2,11.637 12.2,12.457 17.109,17.366 19.86,17.366 U5.35
SS2: J2.14 U5.36 | length 20.2
  Bottom Layer w0.2: J2.14 8.675,5.885 10.175,7.385 10.175,8.778 10.975,9.578 10.975,10.978 11.8,11.803 11.8,12.623 16.967,17.79 20.143,17.79 U5.36
SWDCLK: J4.7 U5.5 | length 12.8
  Bottom Layer w0.3: v1(14.7,6.7) 14.524,6.524 14.524,5.574 16.574,3.524 20.286,3.524 21.236,2.574 23.156,2.574 U5.5
SWDIO: J4.8 U5.3 | length 10.7
  Top Layer w0.3: J4.8@15.375,3.1 15.675,2.8 v1(16.011,2.8)
  Bottom Layer w0.3: v1(16.011,2.8) 16.206,2.995 20.108,2.995 21.029,2.074 24.07,2.074 U5.3
TD_N: J1.3 R21.2 U6.16 | length 8.2
  Top Layer w0.3: U6.16 43.875,5.125 44.1,5.35 44.45,5.7 48.51,5.7 J1.3
TD_P: J1.4 R20.1 U6.17 | length 5.8
  Top Layer w0.3: U6.17 42.375,5.625 R20.1 43,6.25 45.71,6.25 J1.4
TGT_P1.0: U5.95 U6.3 | length 10.7
  Top Layer w0.2: U6.3 34.85,3.799 35.473,4.422 v1(35.5,4.422)
  Bottom Layer w0.2: U5.95 30.318,4.15 30.318,4.009 31.174,3.153 33.33,3.153 33.686,2.797 35.545,2.797 36.1,3.351 36.1,3.849 35.527,4.422 v1(35.5,4.422)
TGT_P1.1: U5.94 U6.4 | length 7.2
  Top Layer w0.2: U6.4 35.4,2.075 35.4,3.5 v1(35.5,3.6)
  Bottom Layer w0.2: U5.94 31.523,3.582 33.467,3.582 33.851,3.197 35.097,3.197 v1(35.5,3.6)
TGT_P1.4: U5.93 U6.2 | length 5.5
  Top Layer w0.2: v1(34.1,3.797) 34.4,3.497 34.4,2.125 U6.2
  Bottom Layer w0.2: U5.93 31.813,3.999 33.898,3.999 v1(34.1,3.797)
TGT_P1.8: U5.92 U6.40 | length 7.5
  Top Layer w0.2: U6.40 32.35,7.575 33.174,7.575 33.35,7.399 33.35,6.465 34.5,5.315 v1(34.5,5.3)
  Bottom Layer w0.2: U5.92 31.9,4.619 31.971,4.619 32.008,4.582 33.73,4.582 34.448,5.3 v1(34.5,5.3)
TGT_P1.9: U5.91 U6.43 | length 4.3
  Top Layer w0.2: U6.43 33.124,6.125 33.35,5.899 33.35,5.55 v1(33.6,5.3)
  Bottom Layer w0.2: U5.91 31.732,5.564 31.732,5.423 32.174,4.982 33.182,4.982 33.55,5.35 v1(33.6,5.3)
TGT_P1.10: U5.90 U6.44 | length 3.6
  Top Layer w0.2: v1(30.8,6.5) 30.8,6.25 31.375,5.675 32.3,5.675 U6.44
  Bottom Layer w0.2: v1(30.8,6.5) 30.954,6.654 31.279,6.654 U5.90
TGT_P1.14: U5.89 U6.41 | length 3.1
  Top Layer w0.2: v1(31.05,7.3) 31.225,7.125 U6.41
  Bottom Layer w0.2: v1(31.05,7.3) 31.195,7.155 31.485,7.155 U5.89
TGT_P1.16: U5.87 U6.31 | length 8.6
  Top Layer w0.2: U6.31 36.35,9.366 37.4,8.316 v1(37.4,7.8)
  Bottom Layer w0.2: U5.87@33.076,6.908 U5.87 33.736,6.318 35.173,6.318 36.343,7.488 37.088,7.488 v1(37.4,7.8)
TGT_P1.17: U5.86 U6.30 | length 7.3
  Top Layer w0.2: U6.30 36.85,9.75 37.155,9.445 37.245,9.445 37.29,9.4 v1@37.3,9.4
  Bottom Layer w0.2: U5.86 33.5,7.332 33.5,7.191 33.941,6.749 35.038,6.749 36.177,7.888 36.602,7.888 36.953,8.24 36.953,9.088 v1(37.215,9.35) ; v1@37.3,9.35 v1@37.3,9.4
TGT_RX: J4.6 U5.99 | length 20.5
  Top Layer w0.2: J4.6@13.045,3.1 J4.6 13.045,4.245 14.5,5.7 16.452,5.7 18.252,7.5 23.488,7.5 23.839,7.149 23.839,6.712 24.451,6.1 v1(24.5,6.1)
  Bottom Layer w0.2: v1(24.5,6.1) 24.565,6.1 27.296,3.369 28.2,3.369 U5.99
TGT_TX: J4.5 U5.98 | length 21.4
  Top Layer w0.2: J4.5@11.775,7.6 11.775,7.175 12.85,6.1 16.25,6.1 18.05,7.9 23.653,7.9 24.5,7.053 v1(24.5,6.9)
  Bottom Layer w0.2: v1(24.5,6.9) 24.613,6.9 25.1,6.413 25.1,6.13 27.461,3.769 28.578,3.769 29.116,3.231 29.116,3.09 U5.98
TX: U1.2 U5.75 | length 7.6
  Top Layer w0.3: U1.2@43.7,12.8 U1.2@43.7,13.1
  Bottom Layer w0.3: U5.75 37.437,14.027 39.048,14.027 39.737,13.338 43.462,13.338 v1@43.7,13.1
  other v1: 43.7,13.2
TX_LIDAR: J2.11 U5.46 | length 27.3
  Bottom Layer w0.2: J2.11 9.395,9.695 9.775,10.075 9.775,11.475 10.6,12.3 10.6,13.12 16.47,18.99 21.232,18.99 23.5,21.259 23.745,21.259 U5.46
TX_RS485: U1.7 U4.4 | length 3
  Bottom Layer w0.3: v1(43.9,17.4) 44.7,16.6 U4.4@46.6,16.6
TX_XBEE: J2.9 U5.48 | length 26.4
  Bottom Layer w0.2: J2.9 9.379,12.235 9.8,12.656 9.8,13.451 16.139,19.79 20.9,19.79 23.169,22.059 24.36,22.059 U5.48
VDDA: C11.1 L1.2 U5.10 U5.12 | length 3.8
  Bottom Layer w0.3: U5.12 20.999,5.367 v1(20.999,4.751) 21.179,4.932 21.978,4.932 U5.10
X1: C25.1 U5.22 X1.3 | length 5.4
  Bottom Layer w0.3: C25.1 15.801,5.701 X1.3 16.692,8.131 U5.22
X2: C26.1 U5.23 X1.1 | length 3.7
  Bottom Layer w0.3: C26.1 16.274,9.724 16.274,9.626 X1.1 17.382,9.528 U5.23
Y: J3.3 R8.2 R10.1 U4.6 | length 11
  Top Layer w0.3: J3.3 36.215,19.835 R8.2
  Bottom Layer w0.3: J3.3 36.404,20.921 36.404,19.067 39.371,16.1 U4.6
Z: J3.4 R10.2 R12.1 U4.7 | length 10.6
  Top Layer w0.3: v1(37.901,19.52) R12.1
  Bottom Layer w0.3: J3.4 37.485,18.693 39.578,16.6 U4.7 ; v1(37.901,19.52) R10.2@37.901,19.565
pads on no net: C3.0 C5.0 C6.0 C7.0 C10.0 C11.0 C12.0 C13.0 C14.0 C15.0 C16.0 C17.0 C18.0 C19.0 C20.0 C21.0 C22.0 C23.0 C24.0 C25.0 C26.0 C27.0 C28.0 C29.0 C30.0 C31.0 D3.0 J1.drill J3.drill J4.4 L1.0 LED1.0 LED2.0 LED3.0 LED4.0 R1.0 R2.0 R3.0 R4.0 R5.0 R6.0 R7.0 R8.0 R9.0 R10.0 R11.0 R12.0 R13.0 R14.0 R15.0 R16.0 R17.0 R18.0 R19.0 R20.0 R21.0 R22.0 R23.0 R24.0 R25.0 U5.1 U5.2 U5.4 U5.6 U5.7 U5.8 U5.9 U5.13 U5.14 U5.16 U5.18 U5.19 U5.20 U5.21 U5.24 U5.25 U5.26 U5.27 U5.29 U5.30 U5.32 U5.33 U5.52 U5.56 U5.57 U5.61 U5.62 U5.63 U5.64 U5.65 U5.66 U5.67 U5.68 U5.69 U5.70 U5.73 U5.76 U5.77 U5.78 U5.79 U5.80 U5.81 U5.82 U5.85 U5.100 U6.1 U6.5 U6.6 U6.8 U6.9 U6.10 U6.11 U6.12 U6.25 U6.26 U6.33 U6.38 U6.42 U6.45 U6.46 X1.2 X1.4

## Polygon pours and split planes (outlines as drawn)
GND on Top Layer "Top Layer-GND" (solid, remove dead copper, pour order 12): 0,0 50,0 50,13.3 40.35,13.3 37.45,16.2 35.5,16.2 28.4,23.3 13.9,23.3 11.2,20.6 0,20.6
3.3V on Top Layer "3.3V_L01_P008" (solid, pour order 8): 5,16.6 5,18.7 2,18.7 2,16.6
5V on Top Layer "5V_L01_P006" (solid, pour order 6): 9.5,17.85 9.5,19.365 6.5,19.365 6.5,17.85
GND on Bottom Layer "Bottom Layer-GND" (solid, remove dead copper, pour order 10): 0,20.6 0,0 50,0 50,13.3 38.4,13.3 28.4,23.3 13.9,23.3 11.2,20.6

## Silkscreen, mask and mechanical layers (free items; w line width, h text height)
Mechanical 1:
  the board outline again, w0.1